# EAGLE board Xduino6.0 (EAGLE 6.5.0)
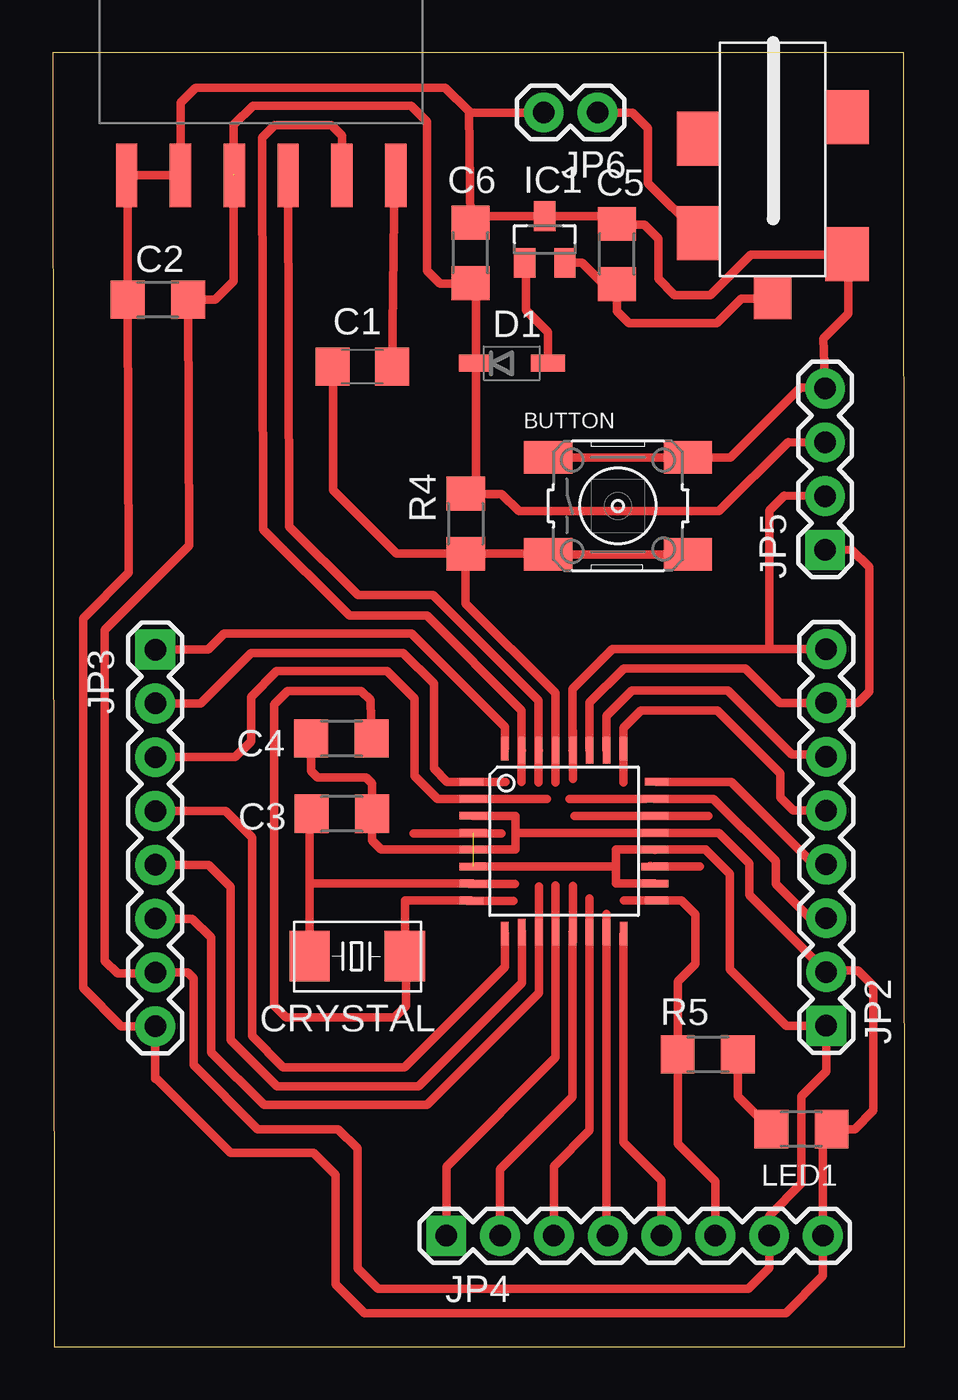
[diagram p0: board, top side]

Size 40.21 x 61.05 mm. Coordinates in mm from the lower left corner, seen from the top.
Outline: 0.05,0 40.21,0 40.16,61.05 0,61.05 0.05,0
Copper layers (1*16): Top 0.035mm / dielectric 1.5mm / Bottom 0.035mm
Design rules "default": minimum track width 10mil, minimum drill 24mil, track to track 8mil, track to pad 8mil, pad to pad 8mil, via to via 8mil, smd to smd 8mil, copper to edge 40mil, drill to drill 8mil, minimum pad ring 10mil, minimum via ring 8mil, stop-mask expansion 4mil, vias tented up to drill 0mil, thermal gap 10mil

## Footprints (pad centres in the part's own frame; a part is rotated, then mirrored left to right if it is on the bottom)
6MM_SWITCH = smd 2.286 x 1.524: 1 -3.302,2.286; 2 3.302,2.286; 3 -3.302,-2.286; 4 3.302,-2.286
1206 = smd 1.6 x 1.8: 1 -1.4,0; 2 1.4,0
1206' = smd 1.6 x 1.803: 1 -1.422,0; 2 1.422,0
CS10 = smd 1.905 x 2.388: P$1 -2.286,0; P$2 2.21,0
SOD123 = smd 1.6 x 0.8: ANODE 1.7,0; CATHODE -1.7,0
SOT23 = smd 1 x 1.4: 1 -0.95,-1.1; 2 0.95,-1.1; 3 0,1.1
JACK_.65MM = smd 2.032 x 2.54: CONTACT 3.578,4.026; SHIELD -3.45,-1.448; SHIELD1 3.578,-0.447; SHUNT -3.45,5.005 | smd 1.778 x 2.032: PIN 0.064,7.071
1X06-SMD_EDGE = smd 1 x 3: 1 0,-0.08; 2 2.54,-0.08; 3 5.08,-0.08; 4 7.62,-0.08; 5 10.16,-0.08; 6 12.7,-0.08
1X08 = drill 1.016 pad 1.88 square: 1 0,0 | drill 1.016 pad 1.88: 2 2.54,0; 3 5.08,0; 4 7.62,0; 5 10.16,0; 6 12.7,0; 7 15.24,0; 8 17.78,0
1X04 = drill 1.016 pad 1.88 square: 1 0,0 | drill 1.016 pad 1.88: 2 2.54,0; 3 5.08,0; 4 7.62,0
1X02 = drill 1.016 pad 1.88: 1 0,0; 2 2.54,0
TQFP32-08THIN = smd 1.118 x 0.356: 1 -4.369,2.8; 8 -4.369,-2.8; 17 4.369,-2.8; 24 4.369,2.8 | smd 1.27 x 0.356: 2 -4.293,2; 3 -4.293,1.2; 4 -4.293,0.4; 5 -4.293,-0.4; 6 -4.293,-1.2; 7 -4.293,-2; 18 4.293,-2; 19 4.293,-1.2; 20 4.293,-0.4; 21 4.293,0.4; 22 4.293,1.2; 23 4.293,2 | smd 0.356 x 1.118: 9 -2.8,-4.369; 16 2.8,-4.369; 25 2.8,4.369; 32 -2.8,4.369 | smd 0.356 x 1.27: 10 -2,-4.293; 14 1.2,-4.293; 15 2,-4.293; 26 2,4.293; 27 1.2,4.293; 31 -2,4.293 | smd 0.35 x 1.27: 11 -1.2,-4.293; 12 -0.4,-4.293; 13 0.4,-4.293; 28 0.4,4.293; 29 -0.4,4.293; 30 -1.2,4.293

## Placement (x,y rotation side)
BUTTON  [6MM_SWITCH]  26.67,39.67 0 top
C1  1uf  [1206]  14.61,46.25 0 top
C2  10uf  [1206']  4.95,49.4 0 top
C3  18pf  [1206']  13.64,25.15 0 top
C4  18pf  [1206']  13.61,28.7 180 top
C5  10uf  [1206']  26.62,51.56 270 top
C6  10uf  [1206']  19.71,51.61 270 top
CRYSTAL  16MHz  [CS10]  14.33,18.41 180 top
D1  [SOD123]  21.67,46.41 0 top
IC1  [SOT23]  23.22,52.25 0 top
J1  JACK.65MM  [JACK_.65MM]  34.04,56.57 180 top
JP1  FDTI  [1X06-SMD_EDGE]  16.18,55.19 180 top
JP2  ANALOGS  [1X08]  36.5,15.14 90 top
JP3  DIGITAL 2-7  [1X08]  4.83,32.89 270 top
JP4  DIGITAL 8-13  [1X08]  18.57,5.23 0 top
JP5  [1X04]  36.45,37.59 90 top
JP6  [1X02]  25.7,58.24 180 top
LED1  [1206']  35.33,10.26 0 top
R4  10k  [1206']  19.48,38.84 90 top
R5  499k  [1206']  30.91,13.79 180 top
U$2  ATMEGA88-THIN  [TQFP32-08THIN]  24.13,23.85 0 top

## Library data of the parts
BUTTON D1 IC1 J1 U$2 = 01_fab
C1 JP1-JP6 = 01_SparkFun
C2-C6 R4 = 01_FAB_Hello
CRYSTAL LED1 R5 = 01_ng

## Nets
A0: JP2.3 U$2.23
A1: JP2.4 U$2.24
A2: JP2.5 U$2.25
A3: JP2.6 U$2.26
A6: U$2.19
A7: U$2.22
DTR: C1.2 JP1.1
EXTVCC: J1.CONTACT JP6.1
GND: BUTTON.1 BUTTON.2 C2.1 C3.2 C4.2 C5.1 C6.1 IC1.3 J1.SHUNT JP1.5 JP1.6 JP2.2 JP3.8 JP4.8 JP5.4 JP6.2 LED1.2 U$2.3 U$2.5 U$2.21
MISO: JP4.5 U$2.16
MOSI: JP4.4 U$2.15
N$2: LED1.1 R5.1
N$3: C5.2 IC1.2 J1.PIN
N$10: C4.1 CRYSTAL.P$1 U$2.8
N$11: C3.1 CRYSTAL.P$2 U$2.7
N$12: D1.ANODE IC1.1
PD2: JP3.1 U$2.32
PD3: JP3.2 U$2.1
PD4: JP3.3 U$2.2
PD5: JP3.4 U$2.9
PD6: JP3.5 U$2.10
PD7: JP3.6 U$2.11
PD8: JP4.1 U$2.12
PD9: JP4.2 U$2.13
PD10: JP4.3 U$2.14
RST: BUTTON.3 BUTTON.4 C1.1 R4.1 U$2.29
RX: JP1.3 U$2.30
SCK: JP4.6 R5.2 U$2.17
SCL: JP2.8 JP5.2 U$2.28
SDA: JP2.7 JP5.1 U$2.27
TX: JP1.2 U$2.31
VCC: C2.2 C6.2 D1.CATHODE JP1.4 JP2.1 JP3.7 JP4.7 JP5.3 R4.2 U$2.4 U$2.6 U$2.18 U$2.20

## Tracks (layer width: path | path; a pad name or v marks a point on that pad's centre or on a via)
A0
  Top 0.406: U$2.23 31.17,25.85 34.11,22.91 34.11,21.84 35.74,20.22 JP2.3
A1
  Top 0.406: U$2.24 32.02,26.65 35.92,22.76 JP2.4
A2
  Top 0.406: U$2.25 26.93,29.19 27.76,30.02 31.37,30.02 34.34,27.05 34.34,25.91 34.95,25.3 JP2.5
A3
  Top 0.406: U$2.26 26.13,29.76 27.33,30.96 31.85,30.96 34.87,27.94 36.4,27.94 JP2.6
DTR
  Top 0.406: C1.2 16.13,55.23 JP1.1
EXTVCC
  Top 0.406: JP6.1 27.36,58.24 28.09,57.51 28.09,54.91 J1.CONTACT
GND
  Top 0.406: U$2.3 21.84,25.05 21.84,24.23 | 21.84,24.23 21.84,23.47 19.84,23.47 U$2.5 15.49,23.45 15.06,23.88 C3.2 | 21.84,24.23 28.42,24.23 U$2.21 31.43,24.25 32.87,22.81 32.87,21.31 JP2.2 36.58,17.75 38,17.75 38.74,17.02 38.74,11.15 37.85,10.26 LED1.2 36.35,9.86 JP4.8 36.35,3.33 34.6,1.57 14.71,1.57 13.34,2.95 13.34,8.1 12.29,9.14 8.38,9.14 4.9,12.62 4.83,12.62 JP3.8 3.23,15.11 1.42,16.92 1.42,34.37 3.58,36.53 C2.1 3.53,55.22 JP1.6 JP1.5 6.02,58.7 6.71,59.39 6.78,59.41 18.52,59.41 19.63,58.29 | BUTTON.1 BUTTON.2 31.98,41.96 35.28,45.26 36.35,45.26 JP5.4 36.37,47.57 37.54,48.74 37.54,51.51 J1.SHUNT | C3.2 | C3.2 15.06,26.57 14.78,26.85 12.5,26.85 12.19,27.15 C4.2 | C4.2 | 26.04,53.35 IC1.3 20.02,53.35 C6.1 19.63,58.29 | 26.04,53.35 26.26,53.35 C5.1 26.67,52.93 | 37.52,51.53 J1.SHUNT | 26.04,53.35 26.42,52.96 27.91,52.96 28.58,52.3 28.58,50.39 29.34,49.63 31.04,49.63 32.94,51.54 37.46,51.54 J1.SHUNT | JP6.2 19.69,58.24 19.63,58.29
MISO
  Top 0.406: U$2.16 26.93,9.65 28.73,7.85 JP4.5
MOSI
  Top 0.406: U$2.15 26.13,5.51 JP4.4
N$1
  Top 0.406: 24.61,25.04 30.94,25.04
N$2
  Top 0.406: LED1.1 33.88,10.26 32.33,11.81 R5.1
N$3
  Top 0.406: 33.8,49.33 J1.PIN 33.93,49.45 32.49,49.45 31.34,48.31 27.18,48.31 26.62,48.87 C5.2 26.59,50.16 25.96,50.16 24.98,51.15 IC1.2
N$5
  Top 0.406: 28.17,22.68 28.19,22.68 28.22,22.66 30.53,22.66
N$10
  Top 0.406: U$2.8 16.61,21.05 CRYSTAL.P$1 16.66,18.36 16.66,16.08 16.13,15.54 11,15.54 10.44,16.1 10.44,30.3 11.07,30.94 14.55,30.94 14.99,30.51 C4.1
N$11
  Top 0.406: CRYSTAL.P$2 12.12,21.95 | 12.12,21.95 12.12,24.38 C3.1 | U$2.7 12.21,21.85 12.12,21.95
N$12
  Top 0.406: D1.ANODE 23.37,47.88 22.33,48.92 22.33,51.09 IC1.1
N$15
  Top 0.406: 21.18,24.21 17.02,24.21
N$20
  Top 0.406: 19.61,25.83 23.32,25.83
N$21
  Top 0.406: 27.97,25.83 24.38,25.83
N$23
  Top 0.406: 25.32,19.3 25.32,21.16
N$24
  Top 0.406: 24.54,19.13 24.54,21.74
N$25
  Top 0.406: 23.72,19.23 23.72,21.77
N$26
  Top 0.406: 22.94,19.28 22.94,21.72
N$27
  Top 0.406: 19.66,21.84 21.82,21.84
N$28
  Top 0.406: 19.56,21.03 21.74,21.03
N$29
  Top 0.406: 28.7,21.06 26.95,21.06
N$30
  Top 0.406: 19.56,26.64 21.36,26.64
N$31
  Top 0.406: 24.54,29.06 24.54,26.8
N$32
  Top 0.406: 26.92,28.68 26.92,26.62
N$34
  Top 0.406: 26.14,19.28 26.14,20.42
PD2
  Top 0.406: 4.83,32.92 JP3.1 7.32,32.89 8.08,33.65 16.92,33.65 21.33,29.24 U$2.32
PD3
  Top 0.406: U$2.1 18.61,26.65 17.98,27.28 17.98,31.29 16.54,32.74 9.35,32.74 6.96,30.35 JP3.2
PD4
  Top 0.406: U$2.2 18.14,25.85 17.07,26.92 17.07,30.58 15.77,31.88 10.57,31.88 9.35,30.66 9.35,28.55 8.61,27.81 JP3.3
PD5
  Top 0.406: JP3.4 8.15,25.27 9.4,24.03 9.4,14.66 10.87,13.18 16.59,13.18 21.33,17.93 U$2.9
PD6
  Top 0.406: JP3.5 7.34,22.73 8.38,21.69 8.38,14.48 10.59,12.27 17.25,12.27 22.13,17.15 U$2.10
PD7
  Top 0.406: JP3.6 6.58,20.19 7.47,19.3 7.47,13.89 9.96,11.4 17.65,11.4 22.93,16.68 U$2.11
PD8
  Top 0.406: U$2.12 23.73,13.65 18.57,8.48 JP4.1
PD9
  Top 0.406: U$2.13 24.53,11.78 21.11,8.36 JP4.2
PD10
  Top 0.406: U$2.14 25.33,10.19 23.65,8.51 JP4.3
RST
  Top 0.406: BUTTON.4 BUTTON.3 23.34,37.41 R4.1 | R4.1 19.48,35.08 23.72,30.84 U$2.29 | U$2.29 | U$2.29 23.72,26.62 | R4.1 16.23,37.41 13.23,40.41 13.23,46.22 C1.1
RX
  Top 0.406: 22.91,28.16 22.91,30.48 17.93,35.46 14.4,35.46 11.15,38.71 JP1.3 | 22.91,28.16 U$2.30 | 22.91,28.16 22.91,26.62
SCK
  Top 0.406: U$2.17 29.67,21.05 30.33,20.4 30.33,18.06 29.49,17.22 R5.2 29.49,9.58 31.27,7.8 JP4.6
SCL
  Top 0.406: 24.51,28.16 U$2.28 24.53,31.03 26.42,32.92 33.68,32.92 | 33.68,32.92 JP2.8 | JP5.2 34.52,40.16 33.81,39.45 33.81,33.05 33.68,32.92
SDA
  Top 0.406: U$2.27 25.33,30.38 26.95,32 32.69,32 34.32,30.38 JP2.7 38,30.38 38.53,30.91 38.53,36.78 37.69,37.62 JP5.1
TX
  Top 0.406: U$2.31 22.12,30.02 17.65,34.49 14,34.49 9.93,38.56 9.88,57.05 10.47,57.63 13.16,57.63 13.64,57.15 JP1.2 | U$2.31 | U$2.31 22.12,26.64
VCC  (2 unrouted)
  Top 0.406: U$2.20 | U$2.6 26.57,22.66 | 8.53,55.3 8.53,57.66 9.45,58.57 16.89,58.57 17.65,57.81 17.65,50.77 18.26,50.16 19.68,50.16 C6.2 19.97,49.93 D1.CATHODE 19.97,40.26 19.99,40.23 | U$2.20 26.57,23.45 26.57,22.66 | U$2.18 26.57,21.85 26.57,22.66 | U$2.20 30.81,23.45 30.81,23.44 31.95,22.3 31.95,17.81 34.62,15.14 JP2.1 36.5,12.98 35.33,11.81 35.33,7.7 33.81,6.17 JP4.7 33.81,3.71 32.82,2.72 15.34,2.72 14.38,3.68 14.38,9.35 13.46,10.26 9.65,10.26 6.63,13.28 6.63,17.37 6.35,17.65 JP3.7 4.78,17.6 3.05,17.6 2.44,18.21 2.44,33.81 6.43,37.79 C2.2 7.65,49.4 8.53,50.29 8.53,55.25 JP1.4 | 19.99,40.23 21.18,40.23 22,39.42 31.45,39.42 34.72,42.7 JP5.3 | 19.99,40.23 19.51,40.23 R4.2